# EAGLE board SolarMonitor (EAGLE 9.7.0)

Size 414.05 x 151.14 mm. Coordinates in mm from the lower left corner, seen from the top.
Outline: 0,0 414.06,0 414.06,151.14 0,151.14 0,0
Copper layers (1*16): Top 0.035mm / dielectric 1.5mm / Bottom 0.035mm
Design rules "default": minimum track width 6mil, minimum drill 0.35mm, track to track 6mil, track to pad 6mil, pad to pad 6mil, via to via 6mil, smd to smd 6mil, copper to edge 40mil, drill to drill 6mil, minimum pad ring 10mil, minimum via ring 8mil, stop-mask expansion 4mil, vias tented up to drill 0mil, thermal gap 10mil

## Footprints (pad centres in the part's own frame; a part is rotated, then mirrored left to right if it is on the bottom)
CAPPRD254W65D500H1150B = drill 0.85 pad 1.45: 1 -1.27,0; 2 1.27,0
DIODE-AXIAL = drill 1: 1 -5.08,0; 2 5.08,0
1X02 = drill 1.016 long: 1 -1.27,0; 2 1.27,0
BATTERY-GENERIC = drill 1.118 pad 3.15 octagon: + 2.54,0; - -2.54,0
RESAD1016W63L850D250B = drill 0.83 pad 1.43: 1 -5.08,0; 2 5.08,0
ARDUINO-UNO-R3-SHIELD = drill 1.016 pad 1.88: 3.3V 24.13,-2.54; 5V 24.13,0; A0 24.13,12.7; A1 24.13,15.24; A2 24.13,17.78; A3 24.13,20.32; A4 24.13,22.86; A5 24.13,25.4; AREF -24.13,-13.97; D2 -24.13,20.32; D3 -24.13,17.78; D4 -24.13,15.24; D5 -24.13,12.7; D6 -24.13,10.16; D7 -24.13,7.62; D8 -24.13,3.81; D9 -24.13,1.27; D10 -24.13,-1.27; D11 -24.13,-3.81; D12 -24.13,-6.35; D13 -24.13,-8.89; GND@0 24.13,2.54; GND@1 24.13,5.08; GND@2 -24.13,-11.43; IOREF 24.13,-7.62; NC 24.13,-10.16; RES 24.13,-5.08; RX -24.13,25.4; SCL -24.13,-19.05; SDA -24.13,-16.51; TX -24.13,22.86; VIN 24.13,7.62
LCD-I2C = drill 1.016 long: 1 -19.05,-5.08; 2 -19.05,-7.62; 3 -19.05,-10.16; 4 -19.05,-12.7

## Placement (x,y rotation side)
C2  0.47  [CAPPRD254W65D500H1150B]  114.11,141.98 180 top
D1  DIODEDIODE-AXIAL  [DIODE-AXIAL]  66.72,140.1 0 top
D2  DIODEDIODE-AXIAL  [DIODE-AXIAL]  6.33,102.87 270 top
L1  LIGHTBULB  [1X02]  279.57,142.73 0 top
P1  BATTERYGENERIC  [BATTERY-GENERIC]  13.69,142.89 180 top
R1  0.2  [RESAD1016W63L850D250B]  220.99,115.53 90 top
R2  0.2  [RESAD1016W63L850D250B]  180.35,115.53 90 top
R3  100k  [RESAD1016W63L850D250B]  105.7,6.33 0 top
R4  10k  [RESAD1016W63L850D250B]  171.57,13.18 0 top
R5  100k  [RESAD1016W63L850D250B]  210.35,46.85 90 top
R6  10k  [RESAD1016W63L850D250B]  188.24,6.98 0 top
R7  1k  [RESAD1016W63L850D250B]  250.77,140.9 0 top
SC1  BATTERYGENERIC  [BATTERY-GENERIC]  16.6,97.18 0 top
U1  ARDUINO-UNO-R3-SHIELD  [ARDUINO-UNO-R3-SHIELD]  169.04,44.91 270 top
U3  LCD-16X2-I2CSUNFOUNDER-IIC  [LCD-I2C]  358.43,135.47 0 top
U4  LCD-16X2-I2CSUNFOUNDER-IIC  [LCD-I2C]  358.26,104.3 0 top

## Library data of the parts
C2 D1 D2 L1 P1 R1-R7 SC1 U1 U3 U4 = Tinkercad

## Nets
D1_C: C2.1 D1.2 D2.2 R5.2 R7.1
L1_1: L1.1 R7.2
P1-: C2.2 L1.2 P1.- R1.1 R1.2 R2.1 R2.2 R4.1 R6.1 SC1.- U1.A2 U1.A3 U1.GND@0 U1.GND@1 U1.GND@2 U3.1 U4.1
SC1+: R3.1 SC1.+
U1_5V: U1.5V U3.2 U4.2
U1_A0: R3.2 R4.2 U1.A0
U1_A1: R5.1 R6.2 U1.A1
U1_A4: U1.A4 U3.3 U4.3
U1_A5: U1.A5 U3.4 U4.4

## Tracks (layer width: path | path; a pad name or v marks a point on that pad's centre or on a via)
D1_C  (4 unrouted)
L1_1  (1 unrouted)
P1-  (16 unrouted)
SC1+  (1 unrouted)
U1_5V  (2 unrouted)
U1_A0  (2 unrouted)
U1_A1  (2 unrouted)
U1_A4  (2 unrouted)
U1_A5  (2 unrouted)